# Altium PCB BUCK_Module_2596_ADJ.PcbDoc
Units mil, origin at the board's own origin, x right, y up, seen from the top; angles counter-clockwise.
Board outline 2362.2 x 1181.1 mil, 2 copper layers (Top Layer, Bottom Layer); 20 components, 36 nets, 144 pads, 21 vias.
Unrouted connection lines stored in the file: 14.
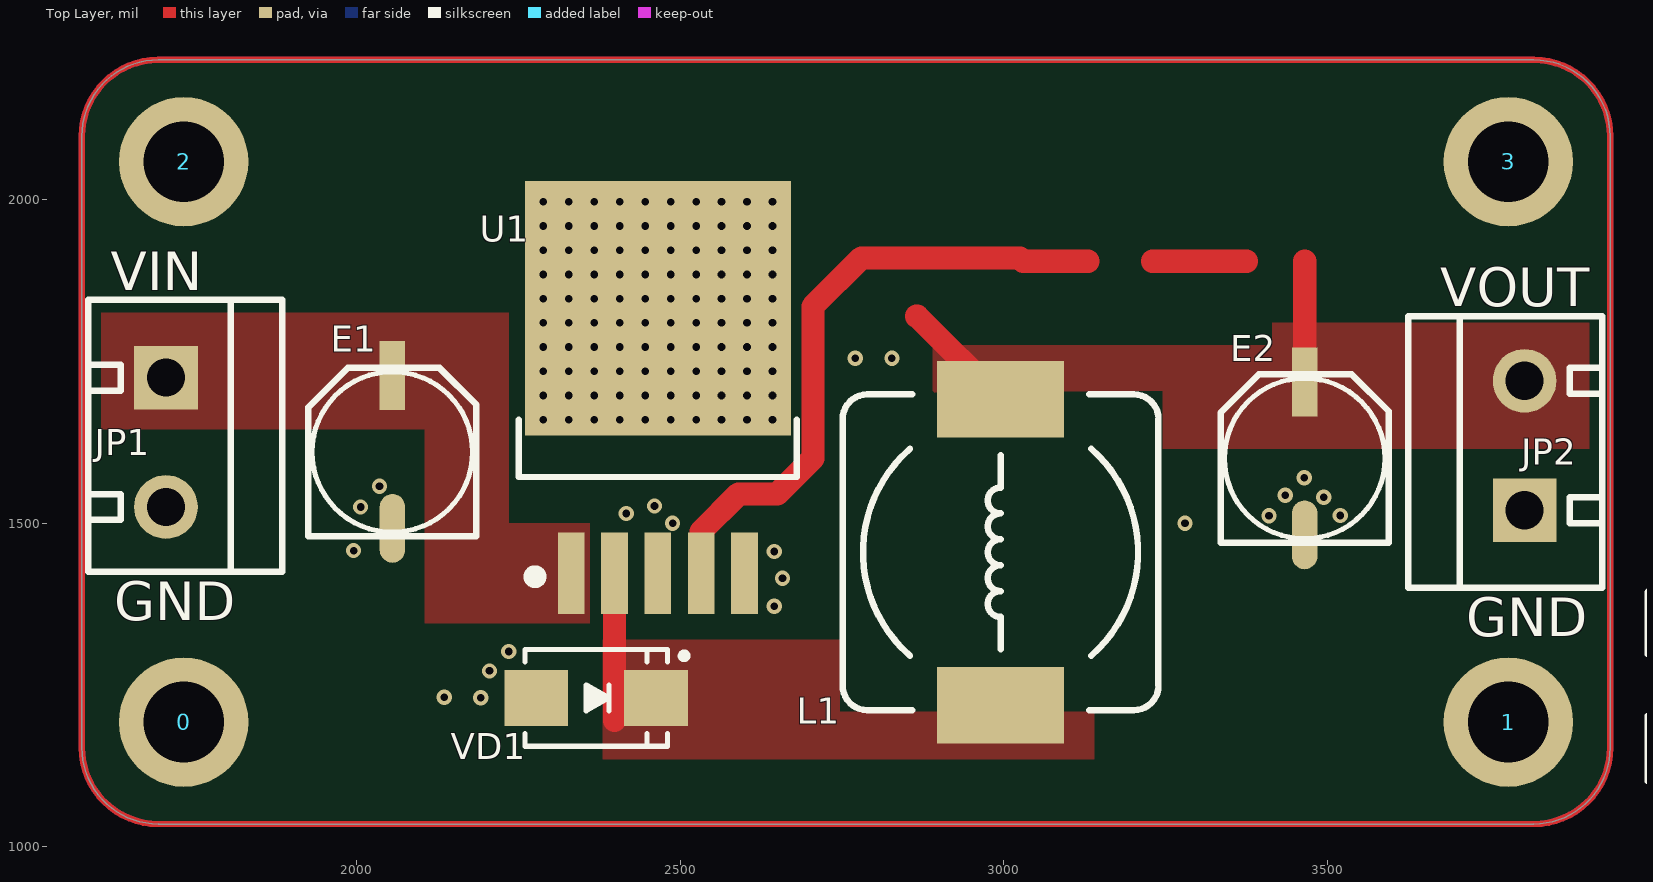
[diagram p0: Top Layer view]
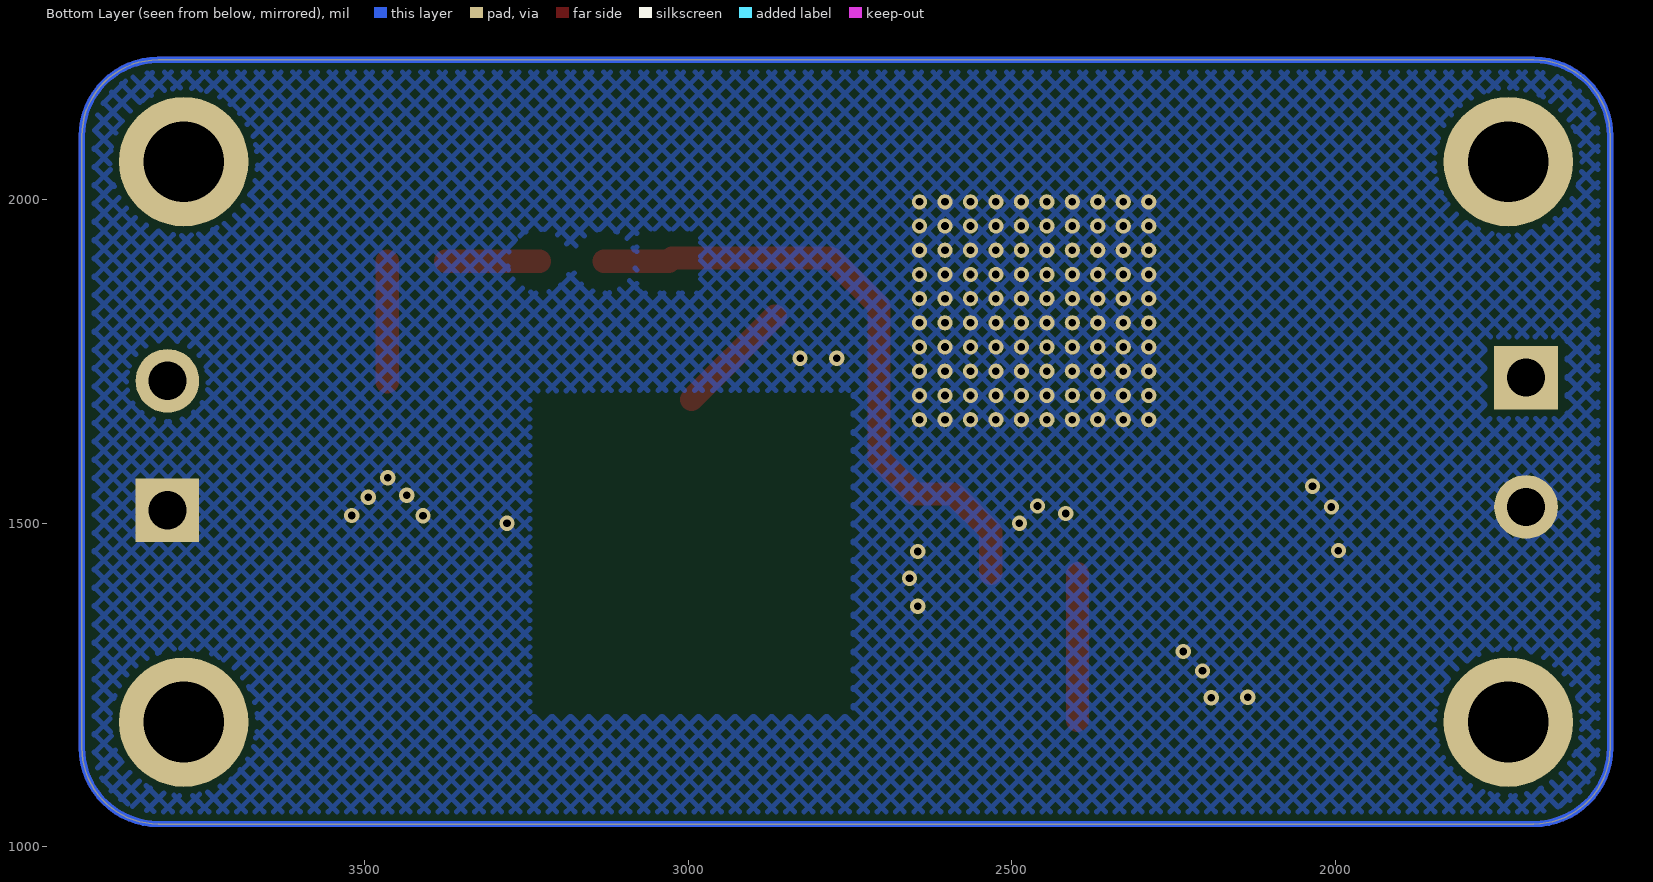
[diagram p1: Bottom Layer view, seen from below]

## Layer stack, top to bottom
Top Solder: solder mask 0.4, Solder Resist, Dk 3.5
Top Layer: signal copper 1.4
Dielectric 1: dielectric 12.6, FR-4, Dk 4.8
Bottom Layer: signal copper 1.4
Bottom Solder: solder mask 0.4, Solder Resist, Dk 3.5

## Board outline
1575,1153.11 ccw(c1693.11,1153.11) 1693.11,1035 3819.09,1035 ccw(c3819.09,1153.11) 3937.2,1153.11 3937.2,2097.99 ccw(c3819.09,2097.99) 3819.09,2216.1 1693.11,2216.1 ccw(c1693.11,2097.99) 1575,2097.99

## Design rules (kind name [scope] priority, off if disabled: settings)
Clearance [All] p1: gap=10 ignorepadtopadclearanceinfootprint=FALSE except(0: Arc-Hole Track-Hole SMDPad-Hole THPad-Hole Via-Hole Fill-Hole Poly-Hole Region-Hole Text-Hole)
PlaneConnect [All] p1: planeconnectstyle=Direct reliefexpansion=20 reliefentries=4 reliefconductorwidth=10 reliefairgap=10
PolygonConnect [All] p1: connectstyle=Direct reliefconductorwidth=10 reliefentries=4 polygonreliefangle="90 Angle" airgapwidth=10
RoomDefinition Sheet2 [InComponentClass('Sheet2')] p1: confinementstyle=ConfineIn formatcopy=TRUE lockcomponents=FALSE outline 3985,1090 5695,1090 5695,1525 3985,1525
RoomDefinition BUCK_Module_2596_ADJ [InComponentClass('BUCK_Module_2596_ADJ')] p2: confinementstyle=ConfineIn formatcopy=TRUE lockcomponents=FALSE outline 0,0 2000,0 2000,1000 0,1000
RoutingVias [All] p1: holewidth=28 width=50 viastyle="Through Hole" minholewidth=28 minwidth=50 maxholewidth=28 maxwidth=50
SolderMaskExpansion [All] p1: expansion=4
Width [All] p1: maxlimit=108 minlimit=10 preferedwidth=36 bottomlayer_prefwidth=10 minimp=50.000000 maximp=50.000000 favimp=50.000000
29 further rules are at their usual default settings.

## Classes and differential pairs
component class BUCK_Module_2596_ADJ: 0 1 2 3 E1 E2 JP1 JP2 L1 U1 VD1

## Components (designator, comment, footprint, x,y, rotation, side; value= is the part's Value field where it differs from the comment)
0 "M3" "M3 125X200" 1732.48,1192.48 r0 top
1 "M3" "M3 125X200" 3779.72,1192.48 r0 top
2 "M3" "M3 125X200" 1732.48,2058.62 r0 top
3 "M3" "M3 125X200" 3779.72,2058.62 r0 top
C6 "Cap" C0805 5625,1385 r0 top value=220nF
C7 "Cap" C0805 5035,1385 r0 top value=220nF
C8 "Cap" C0805 4650,1385 r0 top value=220nF
C9 "Cap" C0805 4260,1385 r0 top value=220nF
C10 "Cap" C0805 5385,1360 r90 top value=680nF
C11 "Cap" C0805 5205,1385 r0 top value=680nF
C12 "Cap" C0805 4795,1360 r90 top value=680nF
C13 "Cap" C0805 4405,1360 r90 top value=680nF
E1 "220uF/35V" "CM D(6.3*5.4)" 2055,1610 r90 top
E2 "220uF/35V" "CM D(6.3*7.7)" 3465,1600 r90 top
JP1 "HDR-1X2" KF301-2P 1705,1725 r270 top
JP2 "HDR-1X2" KF301-2P 3805,1520 r90 top
L1 "33uH" CDRH127 2995,1455 r90 top
U1 "LM2596" LM2596 2465.32,1421.81 r0 top
VD1 "1N5824" SMB#1 4055,1250 r90 top
VD1 "1N5824" SMB#2 2370,1230 r0 top

## Footprints (in the part's own frame and the unit in brackets; to place one, negate y for a bottom-side part, rotate by r counter-clockwise, add the part's x,y. Pads: shape width x height; smd on the part's side, far side on the other; paste and mask are expansions set on the pad)
C0805 [mm] "Chip Capacitor, Body 2.0x1.3mm, IPC High Density"
  rect 1.1x1.4 smd: 1(-0.75,0) 2(0.75,0)
  body extent -1.1,-0.72 1.1,0.72, height 1.4
CDRH127 [mm] "12*12*8mm（长宽高）"
  rect 3x5 smd: 1(-6,0) 2(6,0)
  silkscreen extent -6.2,-6.2 6.2,6.2, body extent -6,-6 6,6, height 7.8
"CM D(6.3*5.4)" [mm] "贴片电解电容，直径6.3mm，高5.4mm"
  rect 2.7x1 smd: 1(3,0)
  oval 2.7x1 smd: 2(-3,0)
  silkscreen extent -3.3,-3.3 3.3,3.3, body extent -3.5,-3.3 3.5,3.3, height 5.4
"CM D(6.3*7.7)" [mm] "贴片电解电容，直径6.3mm，高7.7mm"
  rect 2.7x1 smd: 1(3,0)
  oval 2.7x1 smd: 2(-3,0)
  silkscreen extent -3.3,-3.3 3.3,3.3, body extent -3.5,-3.3 3.5,3.3, height 7.7
KF301-2P [mm] "可拼接端子/6A"
  rect 2.5x2.5 hole 1.5: 1(0,0)
  round 2.5 hole 1.5: 2(5.08,0)
  silkscreen extent -3.05,-3.05 7.62,4.57, body extent -2.87,-3 7.63,4.6, height 10.05
LM2596 [mm] "3A降压芯片"
  rect 1.05x3.2 smd: 1(-3.4,0.01) 2(-1.7,0.01) 3(0,0.01) 4(1.7,0.01) 5(3.4,0.01)
  round 0.6 hole 0.3: 3(-4.5,6.05) 3(-4.5,7) 3(-4.5,7.95) 3(-4.5,8.9) 3(-4.5,9.85) 3(-4.5,10.8) 3(-4.5,11.75) 3(-4.5,12.7) 3(-4.5,13.65) 3(-4.5,14.6) 3(-3.5,6.05) 3(-3.5,7) 3(-3.5,7.95) 3(-3.5,8.9) 3(-3.5,9.85) 3(-3.5,10.8) 3(-3.5,11.75) 3(-3.5,12.7) 3(-3.5,13.65) 3(-3.5,14.6) 3(-2.5,6.05) 3(-2.5,7) 3(-2.5,7.95) 3(-2.5,8.9) 3(-2.5,9.85) 3(-2.5,10.8) 3(-2.5,11.75) 3(-2.5,12.7) 3(-2.5,13.65) 3(-2.5,14.6) 3(-1.5,6.05) 3(-1.5,7) 3(-1.5,7.95) 3(-1.5,8.9) 3(-1.5,9.85) 3(-1.5,10.8) 3(-1.5,11.75) 3(-1.5,12.7) 3(-1.5,13.65) 3(-1.5,14.6) 3(-0.5,6.05) 3(-0.5,7) 3(-0.5,7.95) 3(-0.5,8.9) 3(-0.5,9.85) 3(-0.5,10.8) 3(-0.5,11.75) 3(-0.5,12.7) 3(-0.5,13.65) 3(-0.5,14.6) 3(0.5,6.05) 3(0.5,7) 3(0.5,7.95) 3(0.5,8.9) 3(0.5,9.85) 3(0.5,10.8) 3(0.5,11.75) 3(0.5,12.7) 3(0.5,13.65) 3(0.5,14.6) 3(1.5,6.05) 3(1.5,7) 3(1.5,7.95) 3(1.5,8.9) 3(1.5,9.85) 3(1.5,10.8) 3(1.5,11.75) 3(1.5,12.7) 3(1.5,13.65) 3(1.5,14.6) 3(2.5,6.05) 3(2.5,7) 3(2.5,7.95) 3(2.5,8.9) 3(2.5,9.85) 3(2.5,10.8) 3(2.5,11.75) 3(2.5,12.7) 3(2.5,13.65) 3(2.5,14.6) 3(3.5,6.05) 3(3.5,7) 3(3.5,7.95) 3(3.5,8.9) 3(3.5,9.85) 3(3.5,10.8) 3(3.5,11.75) 3(3.5,12.7) 3(3.5,13.65) 3(3.5,14.6) 3(4.5,6.05) 3(4.5,7) 3(4.5,7.95) 3(4.5,8.9) 3(4.5,9.85) 3(4.5,10.8) 3(4.5,11.75) 3(4.5,12.7) 3(4.5,13.65) 3(4.5,14.6)
  rect 10.45x10 smd: 3(0,10.424)
  silkscreen extent -5.46,-0.32 5.46,6.05, body extent -5,0 5,13.33, height 4.5
"M3 125X200" [mil] "M3螺丝孔，孔125Mil，焊盘200Mil"
  round 200 hole 125: 0(0,0)
SMB#1 [mm] "DO-214-AA/SMB; 2 C-Bend Leads; Body 5.3 x 3.6 mm, inc. leads (LxW)"
  rect 2.3x2.3 smd: 1(-2.25,0) 2(2.25,0)
  silkscreen extent -3.8,-1.55 4.1,1.55
SMB#2 [mm] "4.7*3.9*2.2mm(长宽高，不包括引脚）"
  rect 2.5x2.2 smd: 1(-2.35,0) 2(2.35,0)
  silkscreen extent -2.8,-1.9 3.58,1.9, body extent -2.63,-1.8 2.67,1.8, height 2.35

## Part data
0 1 2 3: "铜柱孔"
C6 C7 C8 C9 C10 C11 C12 C13: "Capacitor", LatestRevisionDate=17-Jul-2002, LatestRevisionNote="Re-released for DXP Platform.", PackageDescription="Radial Cap, Thru-Hole; 2 Leads; 0.3 in Pin Spacing", PackageReference=RAD-0.3, Published=8-Jun-2000, Publisher="Altium Limited"
E1 E2: library part C-CM, "贴片电解电容"
JP1 JP2: library part "Header 2", "2P接插件", BOM名称=2P接, 学习资源=www.ooocke.
L1: library part L-CDRH, "功率屏蔽电感"
VD1 VD1: library part SS24, "肖特基二极管"
  VD1: BOM名称=Ð¤ÌØ», 学习资源=www.ooocke., 属性=40V/2

## Free pads (board coordinates)
  round 0.5 on Mech9: 1(8.7,33.77) 1(8.7,33.77)
  round 2.79 on Mech10: 1(31.95,7.16) 1(31.95,7.16)

## Via types
v1: diameter 23.62, hole 11.81, Top Layer to Bottom Layer, tented both sides, 21 vias

## Nets (pads, with @x,y where several pads share a name; then routed paths per layer and width w, separated by ;. In a path a pad name is that pad's centre, name@x,y a point inside that pad or via, vN(x,y) a via of type N, cw(c..) or ccw(c..) an arc to the next point about the centre after c; other vN are vias at no path point)
5V-OUT: JP2.2
24V-IN: JP1.1
GND: C10.1 C11.2 C12.1 C13.2 E1.2 E2.2 JP1.2 JP2.1 VD1.1
  other v1: 2191.67,1230 2135,1230.83 2205,1271.62 2235,1301.62 2645,1371.37 2657.94,1415 2645,1456.22 1995,1457.6 2488.08,1500 3280,1500.04 3410,1511.47 3520,1511.82 2416.52,1515 2005.83,1525 2460,1526.62 3494.6,1540 3435,1543.03 2035,1557.1 3464.6,1570 2770.49,1755 2827.05,1755
NetC1_1: 
NetC1_2: 
NetC2_1: 
NetC2_2: 
NetC3_2: U1.5
NetC4_1: 
NetC4_2: 
NetC5_1: 
NetC6_1: C6.1
NetC6_2: C6.2 L1.1
NetC7_1: C7.1
NetC7_2: C7.2
NetC8_1: C8.1
NetC8_2: C8.2
NetC9_1: C9.1
NetC9_2: C9.2
NetC10_2: C10.2 L1.2 | length 183.3
  Top Layer w36: 2865,1820 2866.22,1820 L1.2
NetC11_1: C11.1
NetC12_2: C12.2
NetC13_1: C13.1
NetC18_1: 
NetC19_1: 
NetC20_2: 
NetC21_2: 
NetD1_1: 
NetE2_1: E2.1 U1.4 | length 1164.5
  Top Layer w36: U1.4 2532.24,1487.24 2590,1545 2650,1545 2705,1600 2705,1835 2780,1910 3025,1910 3030,1905 3130,1905 ; E2.1 3465,1905
NetL1_1: VD1.2@2462.52,1230 | length 227.2
  Top Layer w36: 2398.39,1195 2398.39,1422.22
NetL5_1: VD1.2@4055,1338.58
NetR1_1: 
NetR3_2: 
NetR4_1: U1.2 U1.3
NetR9_2: 
VCC: E1.1 U1.1
pads on no net: 0.0 1.0 2.0 3.0
copper on no net: | length 13912.7
  Top Layer w10: 1575,1153.11 ccw(c1693.11,1153.11) 1693.11,1035 3819.09,1035 ccw(c3819.09,1153.11) 3937.2,1153.11 3937.2,2097.99 ccw(c3819.09,2097.99) 3819.09,2216.1 1693.11,2216.1 ccw(c1693.11,2097.99) 1575,2097.99 1575,1153.11
  Top Layer w36: 3230,1905 3375,1905
  Bottom Layer w10: 1575,1153.11 ccw(c1693.11,1153.11) 1693.11,1035 3819.09,1035 ccw(c3819.09,1153.11) 3937.2,1153.11 3937.2,2097.99 ccw(c3819.09,2097.99) 3819.09,2216.1 1693.11,2216.1 ccw(c1693.11,2097.99) 1575,2097.99 1575,1153.11

## Polygon pours and split planes (outlines as drawn)
5V-OUT on Top Layer "5V-OUT_L01_P004" (solid, remove dead copper, pour order 4): 2890,1775 2890,1615 3905,1615 3905,1809.61 3415,1809.61 3415,1775
24V-IN on Top Layer "24V-IN_L01_P000" (solid, remove dead copper, pour order 0): 1605,1825 1605,1645 2105,1645 2105,1345 2360,1345 2360,1500 2235,1500 2235,1825
NetL1_1 on Top Layer "NETL1_1_L01_P002" (solid, remove dead copper, pour order 2): 2380,1320 2380,1135 3140,1135 3140,1320
GND on Bottom Layer "GND_L02_P008" (hatched 45Degree grid 20 track 8, remove dead copper, pour order 8): 1500,2310 1500,995 4085,995 4085,2310

## Other copper
Top Layer:
  pour cut-out: 2746.52,1700 2746.52,1208.53 3245.33,1208.53 3245.33,1705
Bottom Layer:
  pour cut-out: 2745,1705 2745,1201.25 3245,1201.25 3245,1704.75

## Silkscreen, mask and mechanical layers (free items; w line width, h text height)
Top Overlay:
  text "VIN" at 1620,1860 h60
  text "VOUT" at 3675,1835 h60
  text "GND" at 1625,1350 h60
  text "GND" at 3715,1325 h60
Mechanical 1:
  the board outline again, w10
Mechanical 2:
  lines w0.5: 4.82,0.95 4.82,3.31 ; 4.82,0.95 5.45,0.95 ; 4.82,0.95 4.82,3.31 ; 4.82,0.95 5.45,0.95 ; 4.82,3.31 5.45,3.31 ; 4.82,3.31 5.45,3.31 ; 4.82,3.48 5.43,3.48 ; 4.82,3.48 4.82,4.7 ; 4.82,3.48 5.43,3.48 ; 4.82,3.48 4.82,4.7 ; 4.82,4.7 5.43,4.7 ; 4.82,4.7 5.43,4.7 ; 5.45,0.95 5.45,3.31 ; 5.45,0.95 5.45,3.31 ; 5.43,3.48 5.43,4.7 ; 5.43,3.48 5.43,4.7
  text "1606" at 26.25,14.95 h0.79 r90
  text "1606" at 26.25,14.95 h0.79 r90
  text "DBG_UART" at 20.02,13.12 h0.79
  text "DBG_UART" at 20.02,13.12 h0.79
  text "GND" at 19.89,11.9 h0.64
  text "GND" at 19.89,11.9 h0.64
  text "5V" at 21.95,11.9 h0.64
  text "5V" at 21.95,11.9 h0.64
  text "TX" at 23.34,11.9 h0.64
  text "TX" at 23.34,11.9 h0.64
  text "RX" at 24.87,11.9 h0.64
  text "RX" at 24.87,11.9 h0.64
  text "NanoPi NEO" at 28.91,9.29 h0.79 r90
  text "NanoPi NEO" at 28.91,9.29 h0.79 r90
Mechanical 3:
  lines w0.5: 0.84,3.23 ccw(c3.14,3.23) 3.14,0.93 ; 0.84,3.23 ccw(c3.14,3.23) 3.14,0.93 ; 0.84,3.23 0.84,38.63 ; 0.84,3.23 0.84,38.63 ; 0.84,38.63 cw(c3.14,38.63) 3.14,40.93 ; 0.84,38.63 cw(c3.14,38.63) 3.14,40.93 ; 3.14,0.93 38.54,0.93 ; 3.14,0.93 38.54,0.93 ; 3.14,40.93 38.54,40.93 ; 3.14,40.93 38.54,40.93 ; 38.54,0.93 ccw(c38.54,3.23) 40.84,3.23 ; 38.54,0.93 ccw(c38.54,3.23) 40.84,3.23 ; 38.54,40.93 cw(c38.54,38.63) 40.84,38.63 ; 38.54,40.93 cw(c38.54,38.63) 40.84,38.63 ; 40.84,3.23 40.84,38.63 ; 40.84,3.23 40.84,38.63
Mechanical 9:
  lines w0.2: 8.2,19.42 8.2,33.42 ; 8.2,19.42 22.2,19.42 ; 8.2,19.42 8.2,33.42 ; 8.2,19.42 22.2,19.42 ; 8.2,33.42 22.2,33.42 ; 8.2,33.42 22.2,33.42 ; 11.17,6.92 24.47,6.92 ; 11.17,6.92 11.17,15.92 ; 11.17,6.92 24.47,6.92 ; 11.17,6.92 11.17,15.92 ; 11.17,7.67 11.17,15.17 ; 11.17,7.67 24.47,7.67 ; 11.17,7.67 11.17,15.17 ; 11.17,7.67 24.47,7.67 ; 11.17,15.17 24.47,15.17 ; 11.17,15.17 24.47,15.17 ; 11.17,15.92 24.47,15.92 ; 11.17,15.92 24.47,15.92 ; 22.2,19.42 22.2,33.42 ; 22.2,19.42 22.2,33.42 ; 24.47,6.92 24.47,15.92 ; 24.47,6.92 24.47,15.92 ; 24.47,7.67 24.47,15.17 ; 24.47,7.67 24.47,15.17 ; 8.2,33.02 8.6,33.42 8.2,33.02 ; 8.2,33.22 8.4,33.42 8.2,33.22
  lines w0.5: 10.72,14.92 10.72,16.42 ; 10.72,14.92 11.72,14.92 ; 10.72,14.92 10.72,16.42 ; 10.72,14.92 11.72,14.92 ; 10.72,16.42 11.72,16.42 ; 10.72,16.42 11.72,16.42 ; 11.72,14.92 11.72,16.42 ; 11.72,14.92 11.72,16.42
Mechanical 10:
  drawing of 8762 lines, arcs and shapes, not listed
Mechanical 11:
  drawing of 392 lines, arcs and shapes, not listed
Mechanical 12:
  drawing of 1078 lines, arcs and shapes, not listed